# EAGLE board 16ch_omn_hirose_adapter (EAGLE 7.2.0)
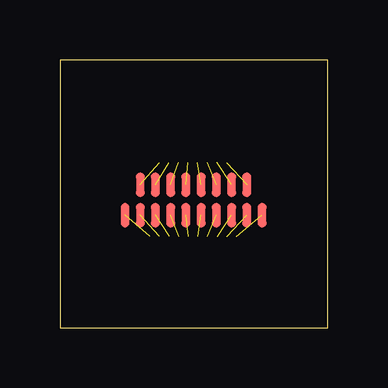
[diagram p0: board, top side]
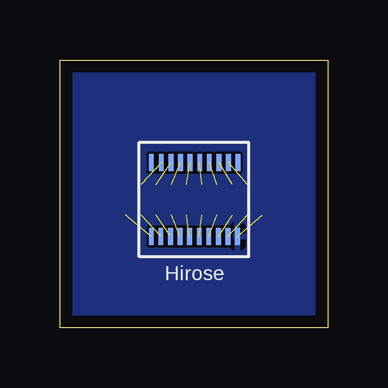
[diagram p1: board, bottom side, seen from below]

Size 11.18 x 11.18 mm. Coordinates in mm from the lower left corner, seen from the top.
Outline: 11.18,11.18 0,11.18 0,0 11.18,0 11.18,11.18
Copper layers (1*16): Top 0.035mm / dielectric 1.5mm / Bottom 0.035mm
Design rules "default *": minimum track width 6mil, minimum drill 15mil, track to track 4mil, track to pad 4mil, pad to pad 4mil, via to via 4mil, smd to smd 4mil, copper to edge 20mil, drill to drill 6mil, minimum pad ring 8mil, minimum via ring 6mil, stop-mask expansion 4mil, vias tented up to drill 0mil, thermal gap 10mil

## Footprints (pad centres in the part's own frame; a part is rotated, then mirrored left to right if it is on the bottom)
HIROSE_DF40C-70DS = smd 0.2 x 0.7: P$1 0,0; P$2 -0.4,0; P$3 -0.8,0; P$4 -1.2,0; P$5 -1.6,0; P$6 -2,0; P$7 -2.4,0; P$8 -2.8,0; P$9 -3.2,0; P$10 -3.6,0; P$36 0,-3.08; P$37 -0.42,-3.08; P$38 -0.82,-3.08; P$39 -1.22,-3.08; P$40 -1.62,-3.08; P$41 -2.02,-3.08; P$42 -2.42,-3.08; P$43 -2.82,-3.08; P$44 -3.22,-3.08; P$45 -3.62,-3.08
OMNETICS_FE18 = smd 0.381 x 1.016: P$1 -1.905,0.635; P$2 -1.27,0.635; P$3 -0.635,0.635; P$4 0,0.635; P$5 0.635,0.635; P$6 1.27,0.635; P$7 1.905,0.635; P$8 2.54,0.635; P$9 2.54,-0.635; P$10 1.905,-0.635; P$11 1.27,-0.635; P$12 0.635,-0.635; P$13 0,-0.635; P$14 -0.635,-0.635; P$15 -1.27,-0.635; P$16 -1.905,-0.635; P$17 -2.54,0.635; P$18 3.175,0.635

## Placement (x,y rotation side)
U$3  HIROSE_DF40_70PIN  [HIROSE_DF40C-70DS]  7.37,3.81 180 bottom
U$4  OMNETICS_FE18  [OMNETICS_FE18]  5.89,5.33 180 top

## Library data of the parts
U$3 = GG_hirose20
U$4 = connectors

## Nets
N$19: U$3.P$10 U$4.P$18
N$20: U$3.P$9 U$4.P$8
N$21: U$3.P$8 U$4.P$7
N$22: U$3.P$7 U$4.P$6
N$23: U$3.P$6 U$4.P$5
N$24: U$3.P$5 U$4.P$4
N$25: U$3.P$4 U$4.P$3
N$26: U$3.P$3 U$4.P$2
N$27: U$3.P$2 U$4.P$1
N$28: U$3.P$1 U$4.P$17
N$29: U$3.P$44 U$4.P$9
N$30: U$3.P$43 U$4.P$10
N$31: U$3.P$42 U$4.P$11
N$32: U$3.P$41 U$4.P$12
N$33: U$3.P$40 U$4.P$13
N$34: U$3.P$39 U$4.P$14
N$35: U$3.P$38 U$4.P$15
N$36: U$3.P$37 U$4.P$16

## Tracks (layer width: path | path; a pad name or v marks a point on that pad's centre or on a via)
N$19  (1 unrouted)
  pour Bottom: 0,11.18 11.18,11.18 11.18,0 0,0
N$20  (1 unrouted)
N$21  (1 unrouted)
N$22  (1 unrouted)
N$23  (1 unrouted)
N$24  (1 unrouted)
N$25  (1 unrouted)
N$26  (1 unrouted)
N$27  (1 unrouted)
N$28  (1 unrouted)
N$29  (1 unrouted)
N$30  (1 unrouted)
N$31  (1 unrouted)
N$32  (1 unrouted)
N$33  (1 unrouted)
N$34  (1 unrouted)
N$35  (1 unrouted)
N$36  (1 unrouted)